# Altium PCB 103091_B0.PcbDoc
Units mil, origin at the board's own origin, x right, y up, seen from the top; angles counter-clockwise.
Board outline 1705 x 1380 mil, 4 copper layers (Top Layer, Top, Mid-Layer 1, mid_gnd, Mid-Layer 2, mid_vin_out, Bottom Layer, Bottom); 13 components, 8 nets, 43 pads, 62 vias.
Unrouted connection lines stored in the file: 4.
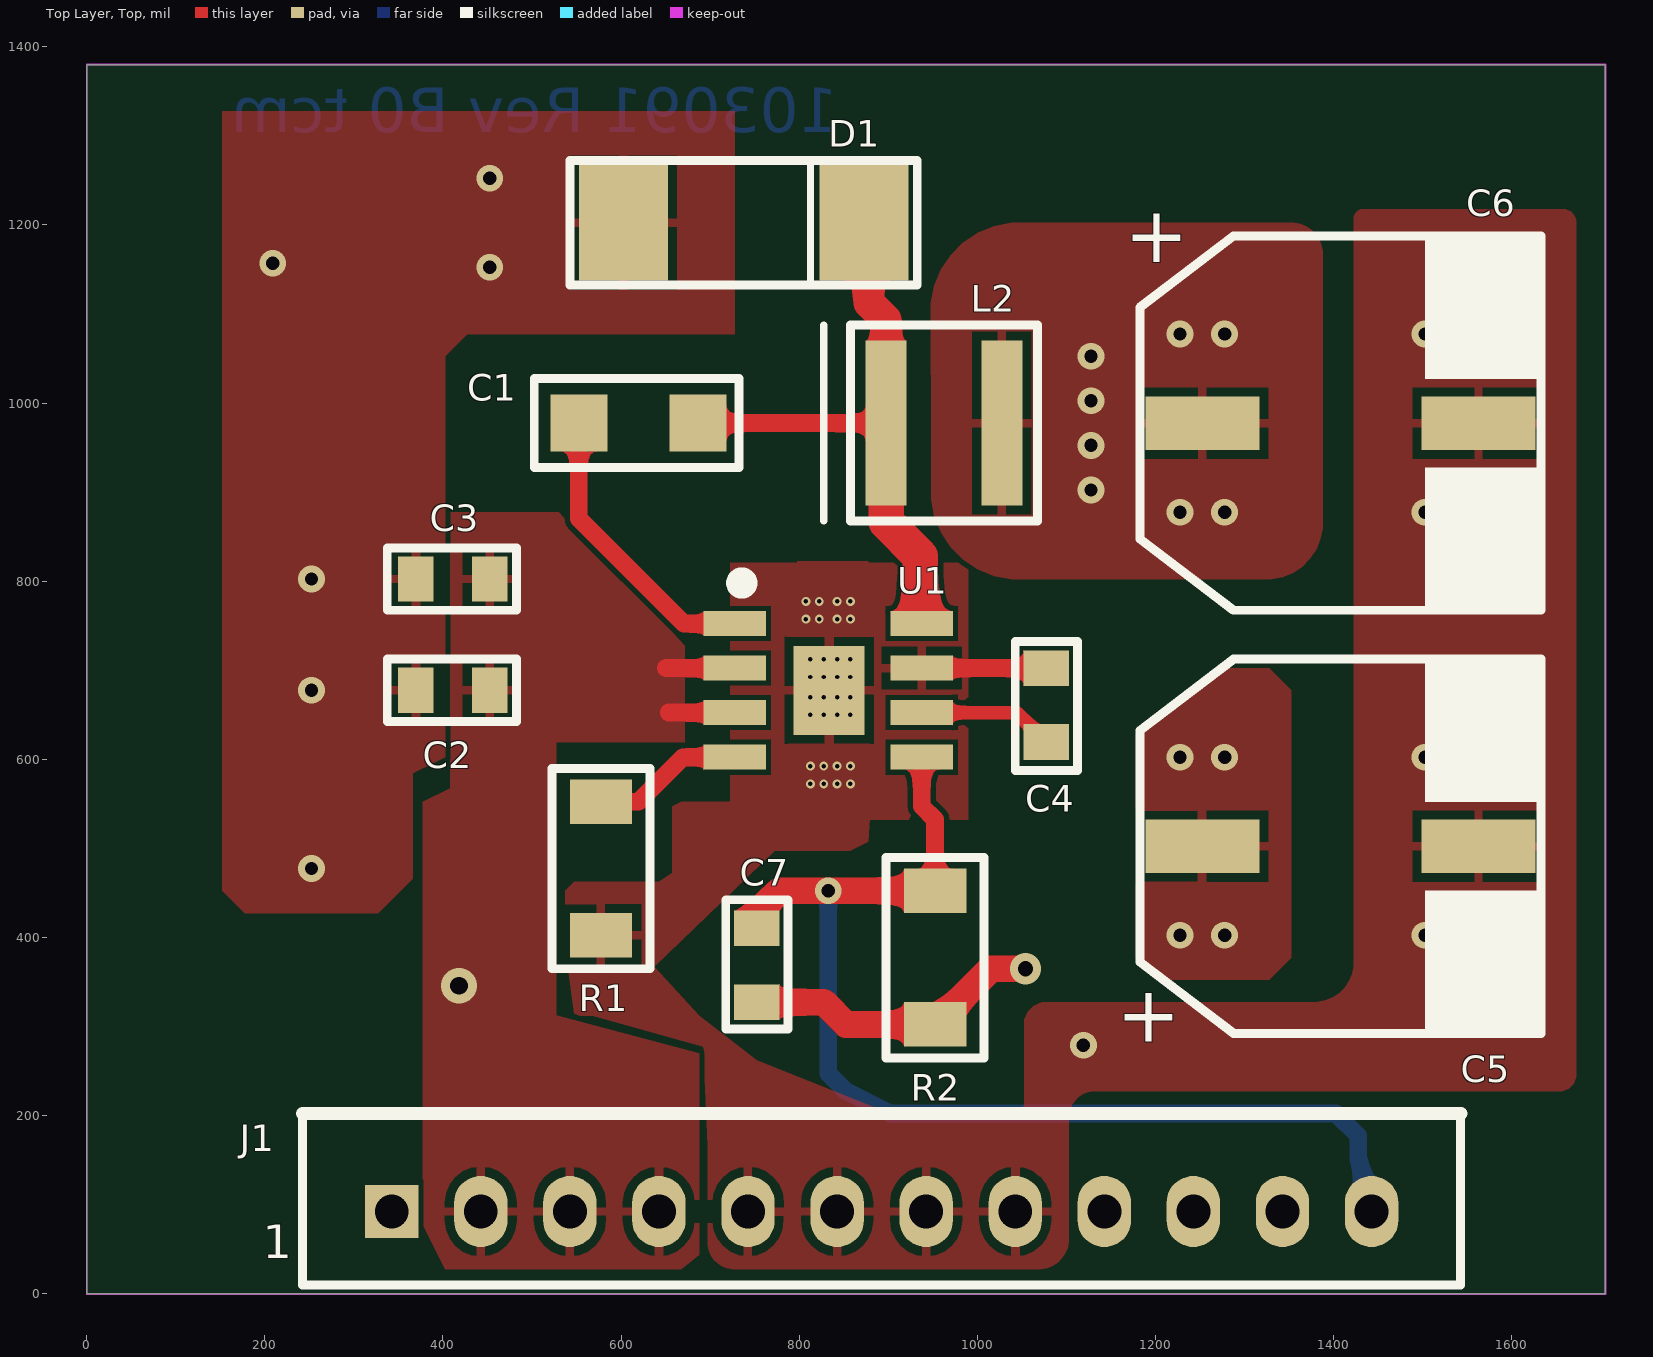
[diagram p0: Top Layer, Top view]
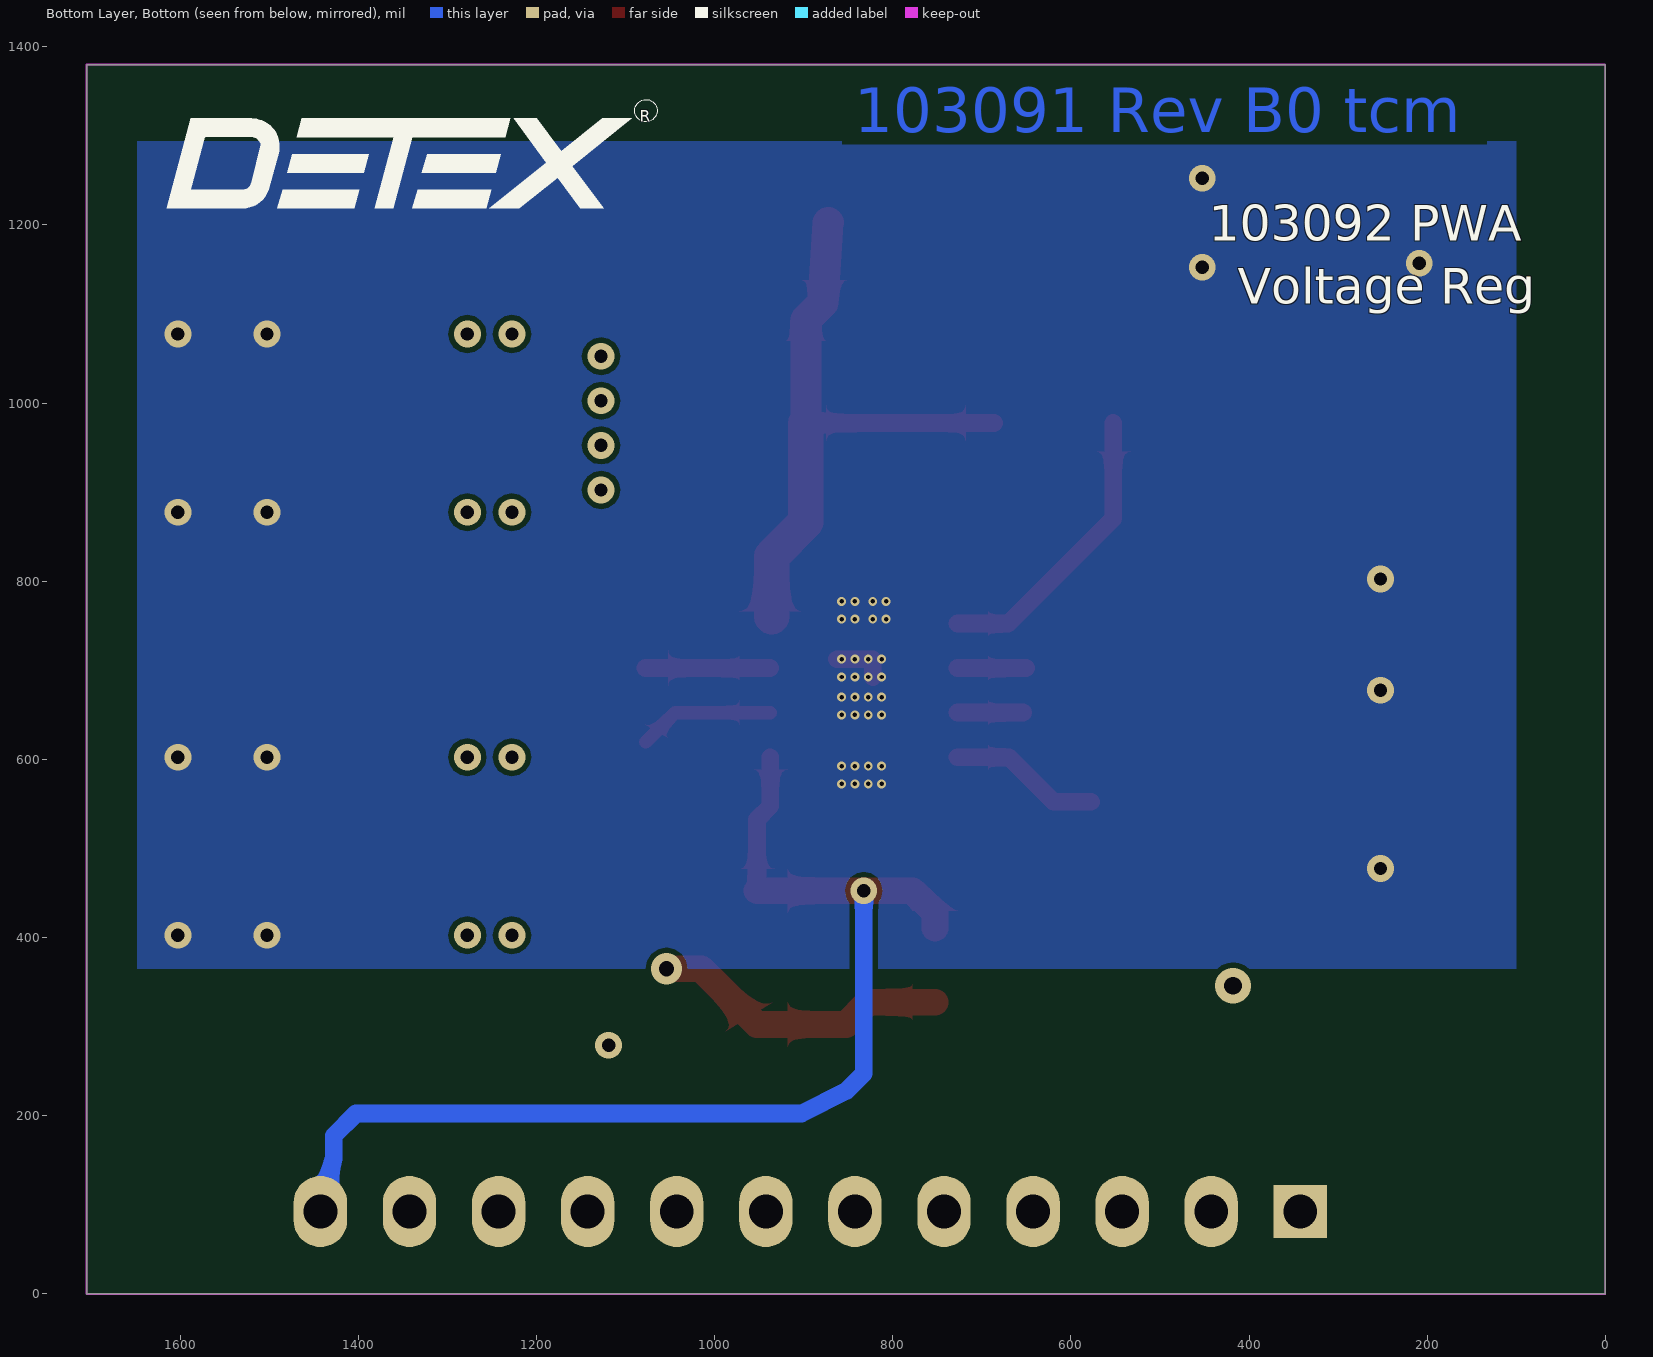
[diagram p1: Bottom Layer, Bottom view, seen from below]
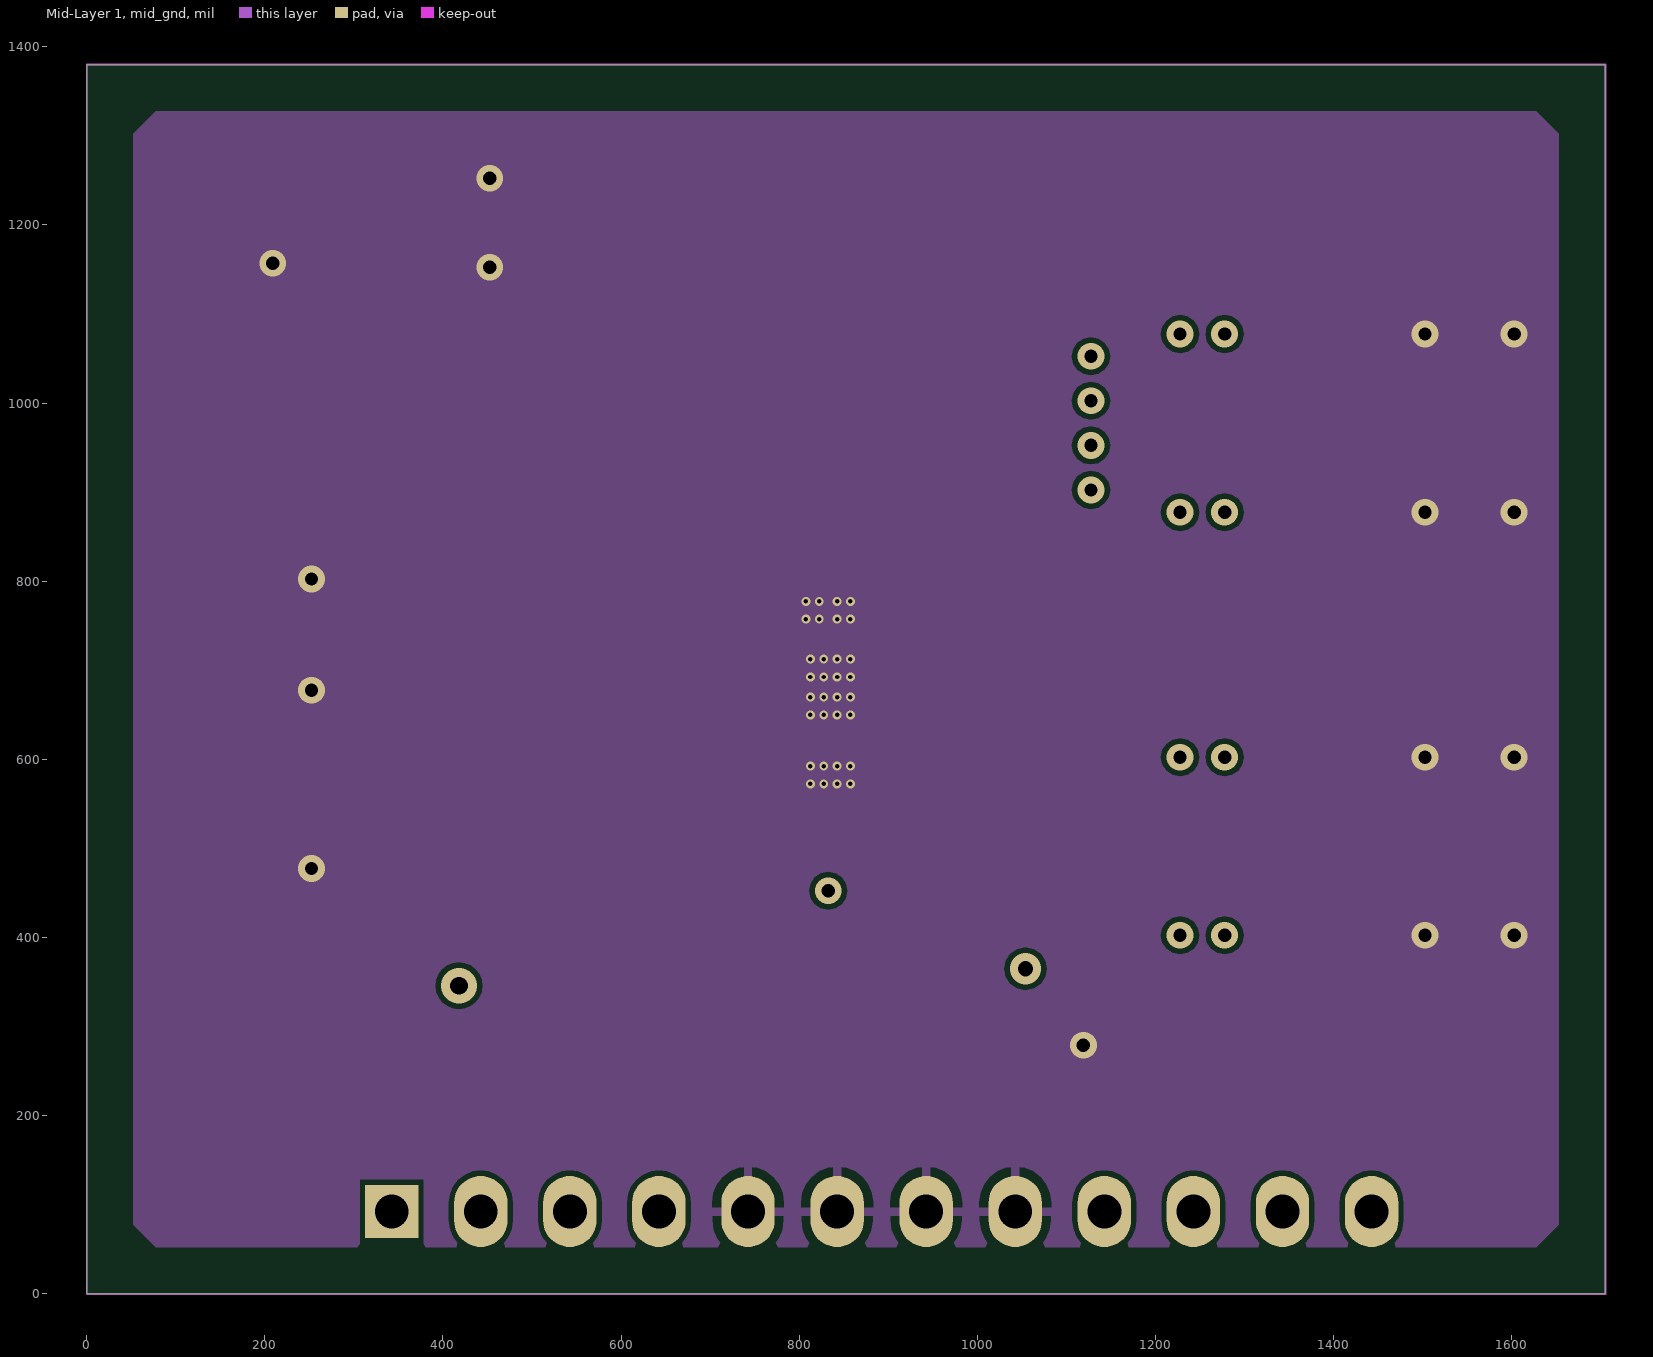
[diagram p2: Mid-Layer 1, mid_gnd]
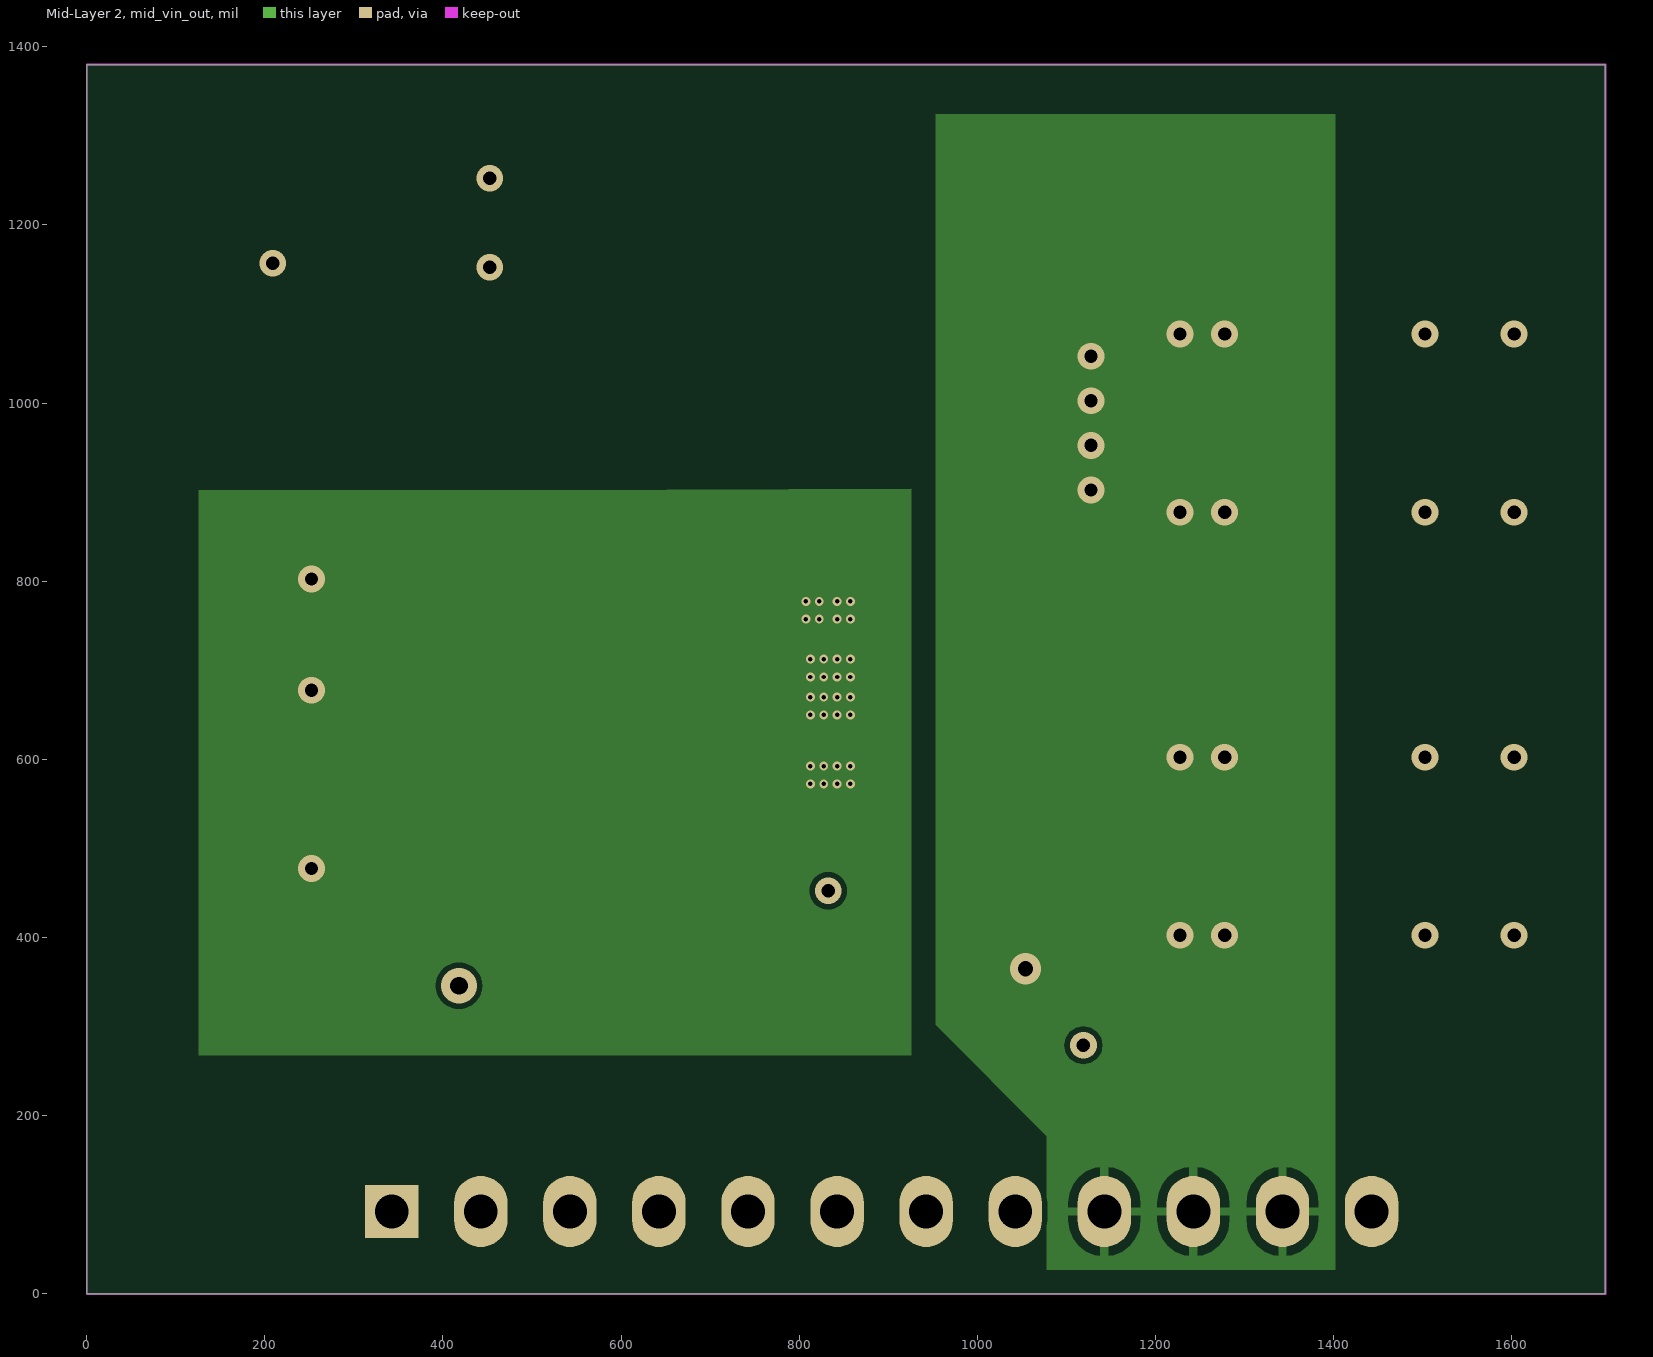
[diagram p3: Mid-Layer 2, mid_vin_out]

## Layer stack, top to bottom
Top Solder, Top Mask: solder mask 0.4, Solder Resist, Dk 3.5
Top Layer, Top: signal copper 1.4
Dielectric 1: dielectric 12.6, FR-4, Dk 4.8
Mid-Layer 1, mid_gnd: signal copper 1.4
Dielectric2: dielectric 12.6, FR-4, Dk 4.8
Mid-Layer 2, mid_vin_out: signal copper 1.4
Dielectric3: dielectric 12.6, FR-4, Dk 4.8
Bottom Layer, Bottom: signal copper 1.4
Bottom Solder, Bot Mask: solder mask 0.4, Solder Resist, Dk 3.5

## Board outline
0,0 1705,0 1705,1380 0,1380

## Design rules (kind name [scope] priority, off if disabled: settings)
BoardOutlineClearance [All] p1: gap=15 ignorepadtopadclearanceinfootprint=FALSE
Clearance "Clearance_Mid-Layer 1, mid_gnd" [ExistsOnLayer('Mid-Layer 1, mid_gnd') vs ExistsOnLayer('Mid-Layer 1, mid_gnd')] p1: gap=6 ignorepadtopadclearanceinfootprint=FALSE
Clearance "Clearance_Mid-Layer 2, mid_vin_out" [ExistsOnLayer('Mid-Layer 2, mid_vin_out') vs ExistsOnLayer('Mid-Layer 2, mid_vin_out')] p2: gap=6 ignorepadtopadclearanceinfootprint=FALSE
Clearance [All] p3: gap=6 ignorepadtopadclearanceinfootprint=FALSE
Height [All] p1 off: minheight=0 maxheight=1000 prefheight=500
MinimumAnnularRing [All] p1: minimumring=5
MinimumSolderMaskSliver [All] p1: minsoldermaskwidth=7
PlaneClearance [All] p1: clearance=6
PlaneConnect PlaneConnect_1 [All] p1 off: pad.planeconnectstyle=Relief pad.reliefexpansion=20 pad.reliefentries=4 pad.reliefconductorwidth=10 pad.reliefairgap=10 via.planeconnectstyle=Direct via.reliefexpansion=20 via.reliefentries=4 via.reliefconductorwidth=10 via.reliefairgap=10
PlaneConnect [All] p2: planeconnectstyle=Relief reliefexpansion=20 reliefentries=4 reliefconductorwidth=10 reliefairgap=10
PolygonConnect PolygonConnect_13 [IsPolygon And InNet('V_OUT') And OnLayer('Mid-Layer 2, mid_vin_out') vs IsVia] p1 off: connectstyle=Relief reliefconductorwidth=15 reliefentries=4 polygonreliefangle="45 Angle" airgapwidth=10
PolygonConnect PolygonConnect_14 [IsPolygon And InNet('V_OUT') And OnLayer('Mid-Layer 2, mid_vin_out') vs IsPad] p2 off: connectstyle=Relief reliefconductorwidth=15 reliefentries=4 polygonreliefangle="45 Angle" airgapwidth=10
PolygonConnect PolygonConnect_10 [IsPolygon And InNet('GNDD') And OnLayer('Mid-Layer 1, mid_gnd') vs IsVia] p3 off: connectstyle=Relief reliefconductorwidth=15 reliefentries=4 polygonreliefangle="45 Angle" airgapwidth=10
PolygonConnect PolygonConnect_9 [IsPolygon And InNet('GNDD') And OnLayer('Mid-Layer 1, mid_gnd') vs IsPad] p4 off: connectstyle=Relief reliefconductorwidth=15 reliefentries=4 polygonreliefangle="45 Angle" airgapwidth=10
PolygonConnect PolygonConnect_8 [IsPolygon And InNet('GNDD') And OnLayer('Bottom Layer, Bottom') vs IsVia] p5 off: connectstyle=Relief reliefconductorwidth=15 reliefentries=4 polygonreliefangle="45 Angle" airgapwidth=10
PolygonConnect PolygonConnect_7 [IsPolygon And InNet('GNDD') vs IsVia] p6 off: connectstyle=Direct reliefconductorwidth=15 reliefentries=4 polygonreliefangle="45 Angle" airgapwidth=10
PolygonConnect PolygonConnect_6 [IsPolygon And InNet('VIN') And OnLayer('Top Layer, Top') vs IsVia] p7 off: connectstyle=Relief reliefconductorwidth=15 reliefentries=4 polygonreliefangle="45 Angle" airgapwidth=10
PolygonConnect PolygonConnect_5 [IsPolygon And InNet('VIN') And OnLayer('Top Layer, Top') vs IsPad] p8 off: connectstyle=Relief reliefconductorwidth=15 reliefentries=4 polygonreliefangle="45 Angle" airgapwidth=10
PolygonConnect PolygonConnect_4 [IsPolygon And InNet('GNDD') And OnLayer('Top Layer, Top') vs IsVia] p9 off: connectstyle=Relief reliefconductorwidth=15 reliefentries=4 polygonreliefangle="45 Angle" airgapwidth=10
PolygonConnect PolygonConnect_3 [IsPolygon And InNet('GNDD') And OnLayer('Top Layer, Top') vs IsPad] p10 off: connectstyle=Relief reliefconductorwidth=15 reliefentries=4 polygonreliefangle="45 Angle" airgapwidth=10
PolygonConnect PolygonConnect_2 [IsPolygon And InNet('V_OUT') And OnLayer('Top Layer, Top') vs IsVia] p11 off: connectstyle=Relief reliefconductorwidth=15 reliefentries=4 polygonreliefangle="45 Angle" airgapwidth=10
PolygonConnect PolygonConnect_1 [All vs ISvIA] p12: connectstyle=Direct reliefconductorwidth=15 reliefentries=4 polygonreliefangle="45 Angle" airgapwidth=10
PolygonConnect [All] p13: connectstyle=Relief reliefconductorwidth=10 reliefentries=4 polygonreliefangle="90 Angle" airgapwidth=10
RoutingVias [All] p1: holewidth=17 width=30 viastyle="Through Hole" minholewidth=7 minwidth=28 maxholewidth=28 maxwidth=60
SilkToSilkClearance [All] p1 off: silktosilkclearance=10
SilkToSolderMaskClearance [IsPad] p1 off: minsilkscreentomaskgap=10 clearancetoexposedcopper=TRUE
SolderMaskExpansion [All] p1: expansion=4
UnRoutedNet [All] p1: checkbadconnections=TRUE
Width [All] p1: maxlimit=300 minlimit=7 preferedwidth=12
23 further rules are at their usual default settings.

## Components (designator, comment, footprint, x,y, rotation, side; value= is the part's Value field where it differs from the comment)
C1 "0.01uF" CC1206_CC1206_NP(Primary) 552.5,977.5 r0 top
C2 "4.7uF" RES_0805 452.5,677.5 r180 top
C3 "4.7uF" RES_0805 452.5,802.5 r180 top
C4 "8.2nF" RES_0805 1077.5,702.5 r270 top
C5 "47uF" CAP_SMT_10X12 1252.5,502.5 r180 top
C6 "47uF" CAP_SMT_10X12 1252.5,977.5 r180 top
C7 "220pf" RES_0805 752.5,327.5 r90 top
D1 "B560-13-F" SMC 602.5,1202.5 r180 top
J1 "" HDR_12CR_100SP 342.5,92.5 r90 top
L2 "4.7uH" IND_SMT_XAL50 1027.5,977.5 r180 top
R1 "21.5k" RES_1206 577.5,552.5 r270 top
R2 "620k" RES_1206 952.5,302.5 r90 top
U1 "LMR14030" LMR14030 727.5,752.5 r0 top locked

## Footprints (in the part's own frame and the unit in brackets; to place one, negate y for a bottom-side part, rotate by r counter-clockwise, add the part's x,y. Pads: shape width x height; smd on the part's side, far side on the other; paste and mask are expansions set on the pad)
CAP_SMT_10X12 [mil]
  rect 128x60 smd: 1(0,0) 2(-310,0)
  silkscreen extent -380,-210 70,210
CC1206_CC1206_NP(Primary) [mil]
  rect 64x64 smd: A(0,0) B(134,0)
  silkscreen extent -50,-50 180,50
HDR_12CR_100SP [mil]
  rect 60x60 hole 38: 1(0,0)
  oval 80x60 hole 38: 2(0,-100) 3(0,-200) 4(0,-300) 5(0,-400) 6(0,-500) 7(0,-600) 8(0,-700) 9(0,-800) 10(0,-900) 11(0,-1000) 12(0,-1100)
  silkscreen extent -83,-1200 110,100
IND_SMT_XAL50 [mil]
  rect 46x185 smd: 1(0,0) 2(130,0)
  silkscreen extent -40,-110 200,110
LMR14030 [mil]
  rect 70x28 smd: 1(0,0) 2(0,-50) 3(0,-100) 4(0,-150) 5(210,-150) 6(210,-100) 7(210,-50) 8(210,0)
  rect 80x100 smd: 9(106,-75)
  silkscreen extent 3,41 13,50
RES_0805 [mil]
  rect 40x51 smd: 1(0,0) 2(83,0)
  silkscreen extent -30,-35 115,35
RES_1206 [mil]
  rect 50x70 smd: 1(0,0) 2(150,0)
  silkscreen extent -38,-55 188,55
SMC [mil]
  rect 100x130 smd: 1(0,0) 2(-270,0)
  silkscreen extent -330,-70 60,70

## Via types
v1: diameter 10, hole 5, Top Layer, Top to Bottom Layer, Bottom, tented both sides, 32 vias
v2: diameter 30, hole 15, Top Layer, Top to Bottom Layer, Bottom, tented both sides, 25 vias
v3: diameter 30, hole 15, Top Layer, Top to Bottom Layer, Bottom, 3 vias
v4: diameter 40, hole 20, Top Layer, Top to Bottom Layer, Bottom, 1 vias
v5: diameter 35, hole 17, Top Layer, Top to Bottom Layer, Bottom, 1 vias

## Nets (pads, with @x,y where several pads share a name; then routed paths per layer and width w, separated by ;. In a path a pad name is that pad's centre, name@x,y a point inside that pad or via, vN(x,y) a via of type N, cw(c..) or ccw(c..) an arc to the next point about the centre after c; other vN are vias at no path point)
GNDD: C2.2 C3.2 C4.1 C5.2 C6.2 D1.1 J1.5 J1.6 J1.7 J1.8 R1.2 U1.7 U1.9 | length 200
  Top Layer, Top w20: U1.9@822.5,692.5 822.5,712.5 v1(842.5,712.5) U1.9@862.5,712.5 ; U1.7 C4.1
  other v1: 812.5,572.5 827.5,572.5 842.5,572.5 857.5,572.5 812.5,592.5 827.5,592.5 842.5,592.5 857.5,592.5 812.5,650 827.5,650 842.5,650 857.5,650 812.5,670 827.5,670 842.5,670 857.5,670 812.5,692.5 827.5,692.5 842.5,692.5 857.5,692.5 812.5,712.5 827.5,712.5 857.5,712.5 807.5,757.5 822.5,757.5 842.5,757.5 857.5,757.5 807.5,777.5 822.5,777.5 842.5,777.5 857.5,777.5
  other v2: 1502.5,402.5 1602.5,402.5 252.5,477.5 1502.5,602.5 1602.5,602.5 252.5,677.5 252.5,802.5 1502.5,877.5 1602.5,877.5 1502.5,1077.5 1602.5,1077.5 452.5,1152.5 209,1157
  other v3: 1119,279 452.5,1252.5
RT_SYNC: R1.1 U1.4 | length 170.7
  Top Layer, Top w20: R1.1 619.5,552.5 669.5,602.5 U1.4
SFT_START: C4.2 U1.6 | length 153.7
  Top Layer, Top w15: U1.6 1044.5,652.5 C4.2
V_BOOT: C1.A U1.1 | length 330.9
  Top Layer, Top w20: C1.A 552.5,870.5 670.5,752.5 U1.1
V_FDBK: C7.2 J1.12 R2.2 U1.5 | length 1295
  Top Layer, Top w20: U1.5 937.5,547.5 952.5,532.5 R2.2
  Top Layer, Top w30: C7.2 752.5,427.5 777.5,452.5 R2.2
  Bottom Layer, Bottom w20: v2(832.5,452.5) 832.5,247.5 852.5,227.5 902.5,202.5 1402.5,202.5 1427.5,177.5 1427.5,152.5 J1.12
V_OUT: C5.1 C6.1 C7.1 J1.9 J1.10 J1.11 L2.1 R2.1 | length 337.7
  Top Layer, Top w30: C7.1 827.5,327.5 852.5,302.5 R2.1 1015,365 v5(1054,365)
  other v2: 1227.5,402.5 1277.5,402.5 1227.5,602.5 1277.5,602.5 1227.5,877.5 1277.5,877.5 1127.5,952.5 1127.5,1002.5 1127.5,1052.5 1227.5,1077.5 1277.5,1077.5
  other v3: 1127.5,902.5
V_SWTCH: C1.B D1.2 L2.2 U1.8 | length 677.5
  Top Layer, Top w20: C1.B L2.2
  Top Layer, Top w35: D1.2 878.5,1112.5 897.5,1093.5 L2.2
  Top Layer, Top w40: L2.2 897.5,866.5 936,828 U1.8@936,760
VIN: C2.1 C3.1 J1.2 J1.3 J1.4 U1.2 U1.3 | length 151
  Top Layer, Top w20: 650.5,702.5 U1.2 ; 653.5,652.5 U1.3
  other v4: 418,346
pads on no net: J1.1

## Polygon pours and split planes (outlines as drawn)
GNDD on Top Layer, Top "Bottom Layer, Bottom-GNDD" (solid, pour order 26): 722.33,532.5 990,532.5 990,820.65 722.33,820.65
V_OUT on Top Layer, Top "V_OUT_L01_P024" (solid, remove dead copper, pour order 24): 948,1031.5 948,902 ccw(c1048,902) 1048,802 1323.84,802 ccw(c1323.84,865.66) 1387.5,865.66 1387.5,1167.5 ccw(c1352.5,1167.5) 1352.5,1202.5 1047.5,1202.5 ccw(c1047.5,1102.5) 947.5,1102.5 947.5,1030.34
GNDD on Top Layer, Top "GNDD_L01_P022" (solid, remove dead copper, pour order 22): 153,1013.5 152.5,1013 152.5,452.5 177.5,427.5 327.5,427.5 352.5,452.5 352.5,577.5 402.5,602.5 402.5,1052.5 427.5,1077.5 727.5,1077.5 727.5,1327.5 152.5,1327.5
GNDD on Top Layer, Top "GNDD_L01_P020" (solid, remove dead copper, pour order 20): 697.5,57.5 ccw(c727.5,57.5) 727.5,27.5 1068.52,27.5 ccw(c1068.52,61.48) 1102.5,61.48 1102.5,197.5 cw(c1132.5,197.5) 1132.5,227.5 1652.5,227.5 ccw(c1652.5,247.5) 1672.5,247.5 1672.5,1202.5 ccw(c1657.5,1202.5) 1657.5,1217.5 1432.5,1217.5 ccw(c1432.5,1207.5) 1422.5,1207.5 1422.5,372.5 cw(c1377.5,372.5) 1377.5,327.5 1077.5,327.5 ccw(c1077.5,302.5) 1052.5,302.5 1052.5,212.5 cw(c1042.5,212.5) 1042.5,202.5 740,202.5 ccw(c740,160) 697.5,160
GNDD on Top Layer, Top "Top Layer, Top-GNDD 1" (solid, pour order 6): 772.5,497.5 857.5,497.5 877.5,507.5 887.5,667.5 887.5,747.5 877.5,822.5 797.5,822.5 782.5,757.5 777.5,692.5 777.5,652.5 782.5,617.5 797.5,552.5 667.5,552.5 657.5,547.5 657.5,472.5 642.5,462.5 547.5,462.5 537.5,452.5 537.5,387.5 547.5,312.5 567.5,312.5 692.5,277.5 702.5,42.5 852.5,32.5 1077.5,32.5 1072.5,202.5 902.5,202.5 752.5,262.5 687.5,312.5 637.5,367.5
VIN on Top Layer, Top "VIN_L01_P004" (solid, pour order 4): 687.5,270.27 527.5,312.77 527.5,619.5 671.75,619.5 671.75,727.5 530,877.5 527.5,877.5 408,877.5 408,567.75 377.5,552.5 377.5,77.5 402.5,27.5 667.5,27.5 687.5,44.06
GNDD on Top Layer, Top "Top Layer, Top-GNDD 2" (solid, pour order 2): 727.5,1077.5 727.5,1327.5 402.5,1327.5 152.5,1327.5 152.5,452.5 202.5,427.5 327.5,427.5 366,466 366,584.25 402.5,602.5 402.5,1052.5 427.5,1077.5
V_OUT on Top Layer, Top "V_OUT_L01_P000" (solid, remove dead copper, pour order 0): 1352.5,677.5 1327.5,702.5 1277.5,702.5 1177.5,627.5 1177.5,377.5 1202.5,352.5 1327.5,352.5 1352.5,377.5
GNDD on Mid-Layer 2, mid_vin_out "GNDD_L03_P028" (solid, remove dead copper, pour order 28): 514,902 126,902 126,268 926,268 926,904
V_OUT on Mid-Layer 2, mid_vin_out "Mid-Layer 2, mid_vin_out-V_OUT" (solid, pour order 16): 953,1324 953,302 1078,177 1078,27 1128,27 1353,27 1402,27 1402,1324
GNDD on Bottom Layer, Bottom "Bottom Layer, Bottom-GNDD" (solid, pour order 12): 100,365 1648,365 1648,1294 100,1294
GNDD on Mid-Layer 1, mid_gnd "Mid-Layer 1, mid_gnd-GNDD" (solid, pour order 14): 1652.5,1302.5 1627.5,1327.5 77.5,1327.5 52.5,1302.5 52.5,77.5 77.5,52.5 1627.5,52.5 1652.5,77.5

## Keep-outs
Keep-Out Layer, Board:
  the board outline again, w2

## Other copper
Bottom Layer, Bottom:
  text "103091 Rev B0 tcm" at 843,1304 h50

## Silkscreen, mask and mechanical layers (free items; w line width, h text height)
Bottom Overlay, Bot Silk:
  circle w1: c1077.08,1328.31 r12.5
  region: 1463.75,1319.5 1469.25,1298.5 1360.25,1298.5 1381.5,1218.75 1360.75,1218.75 1339.25,1298.5 1234.75,1298.5 1229.25,1319.5
  region: 1490.75,1218.75 1404.5,1218.75 1398.75,1239.75 1485,1239.75
  region: 1480,1258.5 1393.75,1258.5 1388,1279.5 1474.25,1279.5
  region: 1225.75,1319.5 1188.75,1269.75 1252.75,1218.75 1219.25,1218.75 1176.25,1253 1150.75,1218.75 1124.5,1218.75 1160,1266 1092.75,1319.5 1126.25,1319.5 1172.25,1282.75 1199.5,1319.5
  region: 1572,1298.5 1519.75,1298.75 1517.75,1298.5 1516.25,1298 1513.5,1296.5 1512.5,1295.25 1511,1293.75 1510.25,1292.5 1509.75,1291.5 1509.5,1290.25 1519.75,1248.75 1520.5,1246.25 1521.5,1244.25 1522.5,1243 1523.75,1241.75 1525.25,1240.75 1526.25,1240.25 1527.5,1240 1528.75,1239.75 1587.75,1239.75 1595,1218.75 1528.25,1218.75 1526,1219 1521.75,1219.75 1518,1221.25 1515.25,1222.25 1513,1223.75 1510.5,1225.75 1507.5,1228.25 1505,1231.25 1503,1234.75 1501.5,1237.5 1500.5,1240.25 1489,1282.5 1488.75,1286 1488.5,1290.75 1489.25,1295 1490.5,1299.25 1492.25,1303.25 1494.5,1306.75 1496.5,1309 1499,1311.75 1502.25,1314 1505,1315.75 1508.25,1317.25 1511,1318.25 1514.25,1319 1516.75,1319.25 1519.75,1319.5 1571.5,1319.5
  region: 1588.25,1319.5 1615.25,1218.75 1593.5,1218.75 1566.5,1319.5
  region: 1339.25,1218.5 1256.25,1218.5 1250.5,1239.5 1333.5,1239.75
  region: 1328.5,1258.5 1245.5,1258.5 1240,1279.5 1322.75,1279.5
  text "R" at 1084,1316 h12.5
  text "103092 PWA" at 445.5,1182.12 h40
  text "Voltage Reg" at 412.74,1111.5 h40
Circuit Outline:
  the board outline again, w1
Drill Drawing, DOC:
  circle w12: c2402.25,421.06 r55.56
  lines w5: -0.3,0 -0.3,1380 1705,1380 1705,0 -0.3,0
  lines w12: 2346.69,226.61 2457.81,226.61 2402.25,115.5 2346.69,226.61 ; 2346.69,615.5 2457.81,615.5 2457.81,726.61 2346.69,726.61 2346.69,615.5 ; 2346.69,893.28 2374.47,893.28 2374.47,865.5 2430.03,865.5 2430.03,893.28 2457.81,893.28 2457.81,948.83 2430.03,948.83 2430.03,976.61 2374.47,976.61 2374.47,948.83 2346.69,948.83 2346.69,893.28 ; 2346.69,1115.5 2346.69,1143.28 2374.47,1171.06 2346.69,1198.83 2346.69,1226.61 2374.47,1226.61 2402.25,1198.83 2430.03,1226.61 2457.81,1226.61 2457.81,1198.83 2430.03,1171.06 2457.81,1143.28 2457.81,1115.5 2430.03,1115.5 2402.25,1143.28 2374.47,1115.5 2346.69,1115.5 ; 2346.69,1365.5 2402.25,1393.28 2457.81,1365.5 2430.03,1421.06 2457.81,1476.61 2402.25,1448.83 2346.69,1476.61 2374.47,1421.06 2346.69,1365.5 ; 2346.69,1643.28 2374.47,1643.28 2402.25,1615.5 2430.03,1643.28 2457.81,1643.28 2430.03,1671.06 2457.81,1698.83 2430.03,1698.83 2402.25,1726.61 2374.47,1698.83 2346.69,1698.83 2374.47,1671.06 2346.69,1643.28
  lines w15: 2248.5,40.5 21742.83,40.5 ; 2248.5,1790.5 21742.83,1790.5 ; 3151.69,-209.5 3151.69,2040.5 ; 4042.13,-209.5 4042.13,2040.5 ; 5865.6,-209.5 5865.6,2040.5 ; 6693.79,-209.5 6693.79,2040.5 ; 7901.86,-209.5 7901.86,2040.5 ; 11674.7,-209.5 11674.7,2040.5 ; 12642.84,-209.5 12642.84,2040.5 ; 13870.91,-209.5 13870.91,2040.5 ; 15844.33,-209.5 15844.33,2040.5 ; 17252.33,-209.5 17252.33,2040.5 ; 19460.08,-209.5 19460.08,2040.5 ; 2248.5,-209.5 21742.83,-209.5 21742.83,2040.5 2248.5,2040.5 2248.5,-209.5
  text "Symbol" at 2398.5,1865.5 h120
  text "Count" at 3226.69,1865.5 h120
  text "Hole Size" at 4117.13,1865.5 h120
  text "Plated" at 5940.6,1865.5 h120
  text "Hole Type" at 6768.79,1865.5 h120
  text "Drill Layer Pair" at 7976.86,1865.5 h120
  text "Via/Pad" at 11749.7,1865.5 h120
  text "Pad Shape" at 12717.84,1865.5 h120
  text "Template" at 13945.91,1865.5 h120
  text "Description" at 15919.33,1865.5 h120
  text "Hole Tolerance (+)" at 17327.33,1865.5 h120
  text "Hole Tolerance (-)" at 19535.08,1865.5 h120
  text "1" at 3226.69,1615.5 h100
  text "15.00mil (0.381mm)" at 4117.13,1615.5 h100
  text "PTH" at 5940.6,1615.5 h100
  text "Round" at 6768.79,1615.5 h100
  text "Top Layer, Top - Bottom Layer, Bottom" at 7976.86,1615.5 h100
  text "Via" at 11749.7,1615.5 h100
  text "Rounded" at 12717.84,1615.5 h100
  text "v76h38m0mx0(Tol8-8)" at 13945.91,1615.5 h100
  text "3.00mil (0.076mm)" at 17327.33,1615.5 h100
  text "3.00mil (0.076mm)" at 19535.08,1615.5 h100
  text "1" at 3226.69,1365.5 h100
  text "17.00mil (0.432mm)" at 4117.13,1365.5 h100
  text "PTH" at 5940.6,1365.5 h100
  text "Round" at 6768.79,1365.5 h100
  text "Top Layer, Top - Bottom Layer, Bottom" at 7976.86,1365.5 h100
  text "Via" at 11749.7,1365.5 h100
  text "Rounded" at 12717.84,1365.5 h100
  text "v89h43(Tol8-8)" at 13945.91,1365.5 h100
  text "3.00mil (0.076mm)" at 17327.33,1365.5 h100
  text "3.00mil (0.076mm)" at 19535.08,1365.5 h100
  text "1" at 3226.69,1115.5 h100
  text "20.00mil (0.508mm)" at 4117.13,1115.5 h100
  text "PTH" at 5940.6,1115.5 h100
  text "Round" at 6768.79,1115.5 h100
  text "Top Layer, Top - Bottom Layer, Bottom" at 7976.86,1115.5 h100
  text "Via" at 11749.7,1115.5 h100
  text "Rounded" at 12717.84,1115.5 h100
  text "v102h51m102(Tol1-1)" at 13945.91,1115.5 h100
  text "0.39mil (0.010mm)" at 17327.33,1115.5 h100
  text "0.39mil (0.010mm)" at 19535.08,1115.5 h100
  text "3" at 3226.69,865.5 h100
  text "5.00mil (0.127mm)" at 4117.13,865.5 h100
  text "PTH" at 5940.6,865.5 h100
  text "Round" at 6768.79,865.5 h100
  text "Top Layer, Top - Bottom Layer, Bottom" at 7976.86,865.5 h100
  text "Via" at 11749.7,865.5 h100
  text "Rounded" at 12717.84,865.5 h100
  text "v25h13m0mx0(Tol8-8)" at 13945.91,865.5 h100
  text "3.00mil (0.076mm)" at 17327.33,865.5 h100
  text "3.00mil (0.076mm)" at 19535.08,865.5 h100
  text "12" at 3226.69,615.5 h100
  text "38.00mil (0.965mm)" at 4117.13,615.5 h100
  text "PTH" at 5940.6,615.5 h100
  text "Round" at 6768.79,615.5 h100
  text "Top Layer, Top - Bottom Layer, Bottom" at 7976.86,615.5 h100
  text "Pad" at 11749.7,615.5 h100
  text "(Mixed)" at 12717.84,615.5 h100
  text "(Mixed)" at 13945.91,615.5 h100
  text "27" at 3226.69,365.5 h100
  text "15.00mil (0.381mm)" at 4117.13,365.5 h100
  text "PTH" at 5940.6,365.5 h100
  text "Round" at 6768.79,365.5 h100
  text "Top Layer, Top - Bottom Layer, Bottom" at 7976.86,365.5 h100
  text "Via" at 11749.7,365.5 h100
  text "Rounded" at 12717.84,365.5 h100
  text "(Mixed)" at 13945.91,365.5 h100
  text "29" at 3226.69,115.5 h100
  text "5.00mil (0.127mm)" at 4117.13,115.5 h100
  text "PTH" at 5940.6,115.5 h100
  text "Round" at 6768.79,115.5 h100
  text "Top Layer, Top - Bottom Layer, Bottom" at 7976.86,115.5 h100
  text "Via" at 11749.7,115.5 h100
  text "Rounded" at 12717.84,115.5 h100
  text "v25h13m0mx0" at 13945.91,115.5 h100
  text "74 Total" at 3226.69,-134.5 h100

## Text inside footprints (layer, text, board x,y; h text height)
C5: Top Overlay, Top Silk "+" at 1228.44,337.5 h62.5 r180
C6: Top Overlay, Top Silk "+" at 1237.5,1212.5 h62.5 r180
J1: Top Overlay, Top Silk "1" at 198,40 h37.5